# Altium PCB New_LXe_twr.PcbDoc (part 5 of 5)
Units mm, origin at the board's own origin, x right, y up, seen from the top; angles counter-clockwise.
Board outline 130 x 150 mm, 6 copper layers (Top Layer, Internal Plane 1, MidLayer1, MidLayer2, Internal Plane 2, Bottom Layer); 673 components, 504 nets, 5569 pads, 803 vias.
Unrouted connection lines stored in the file: 633.
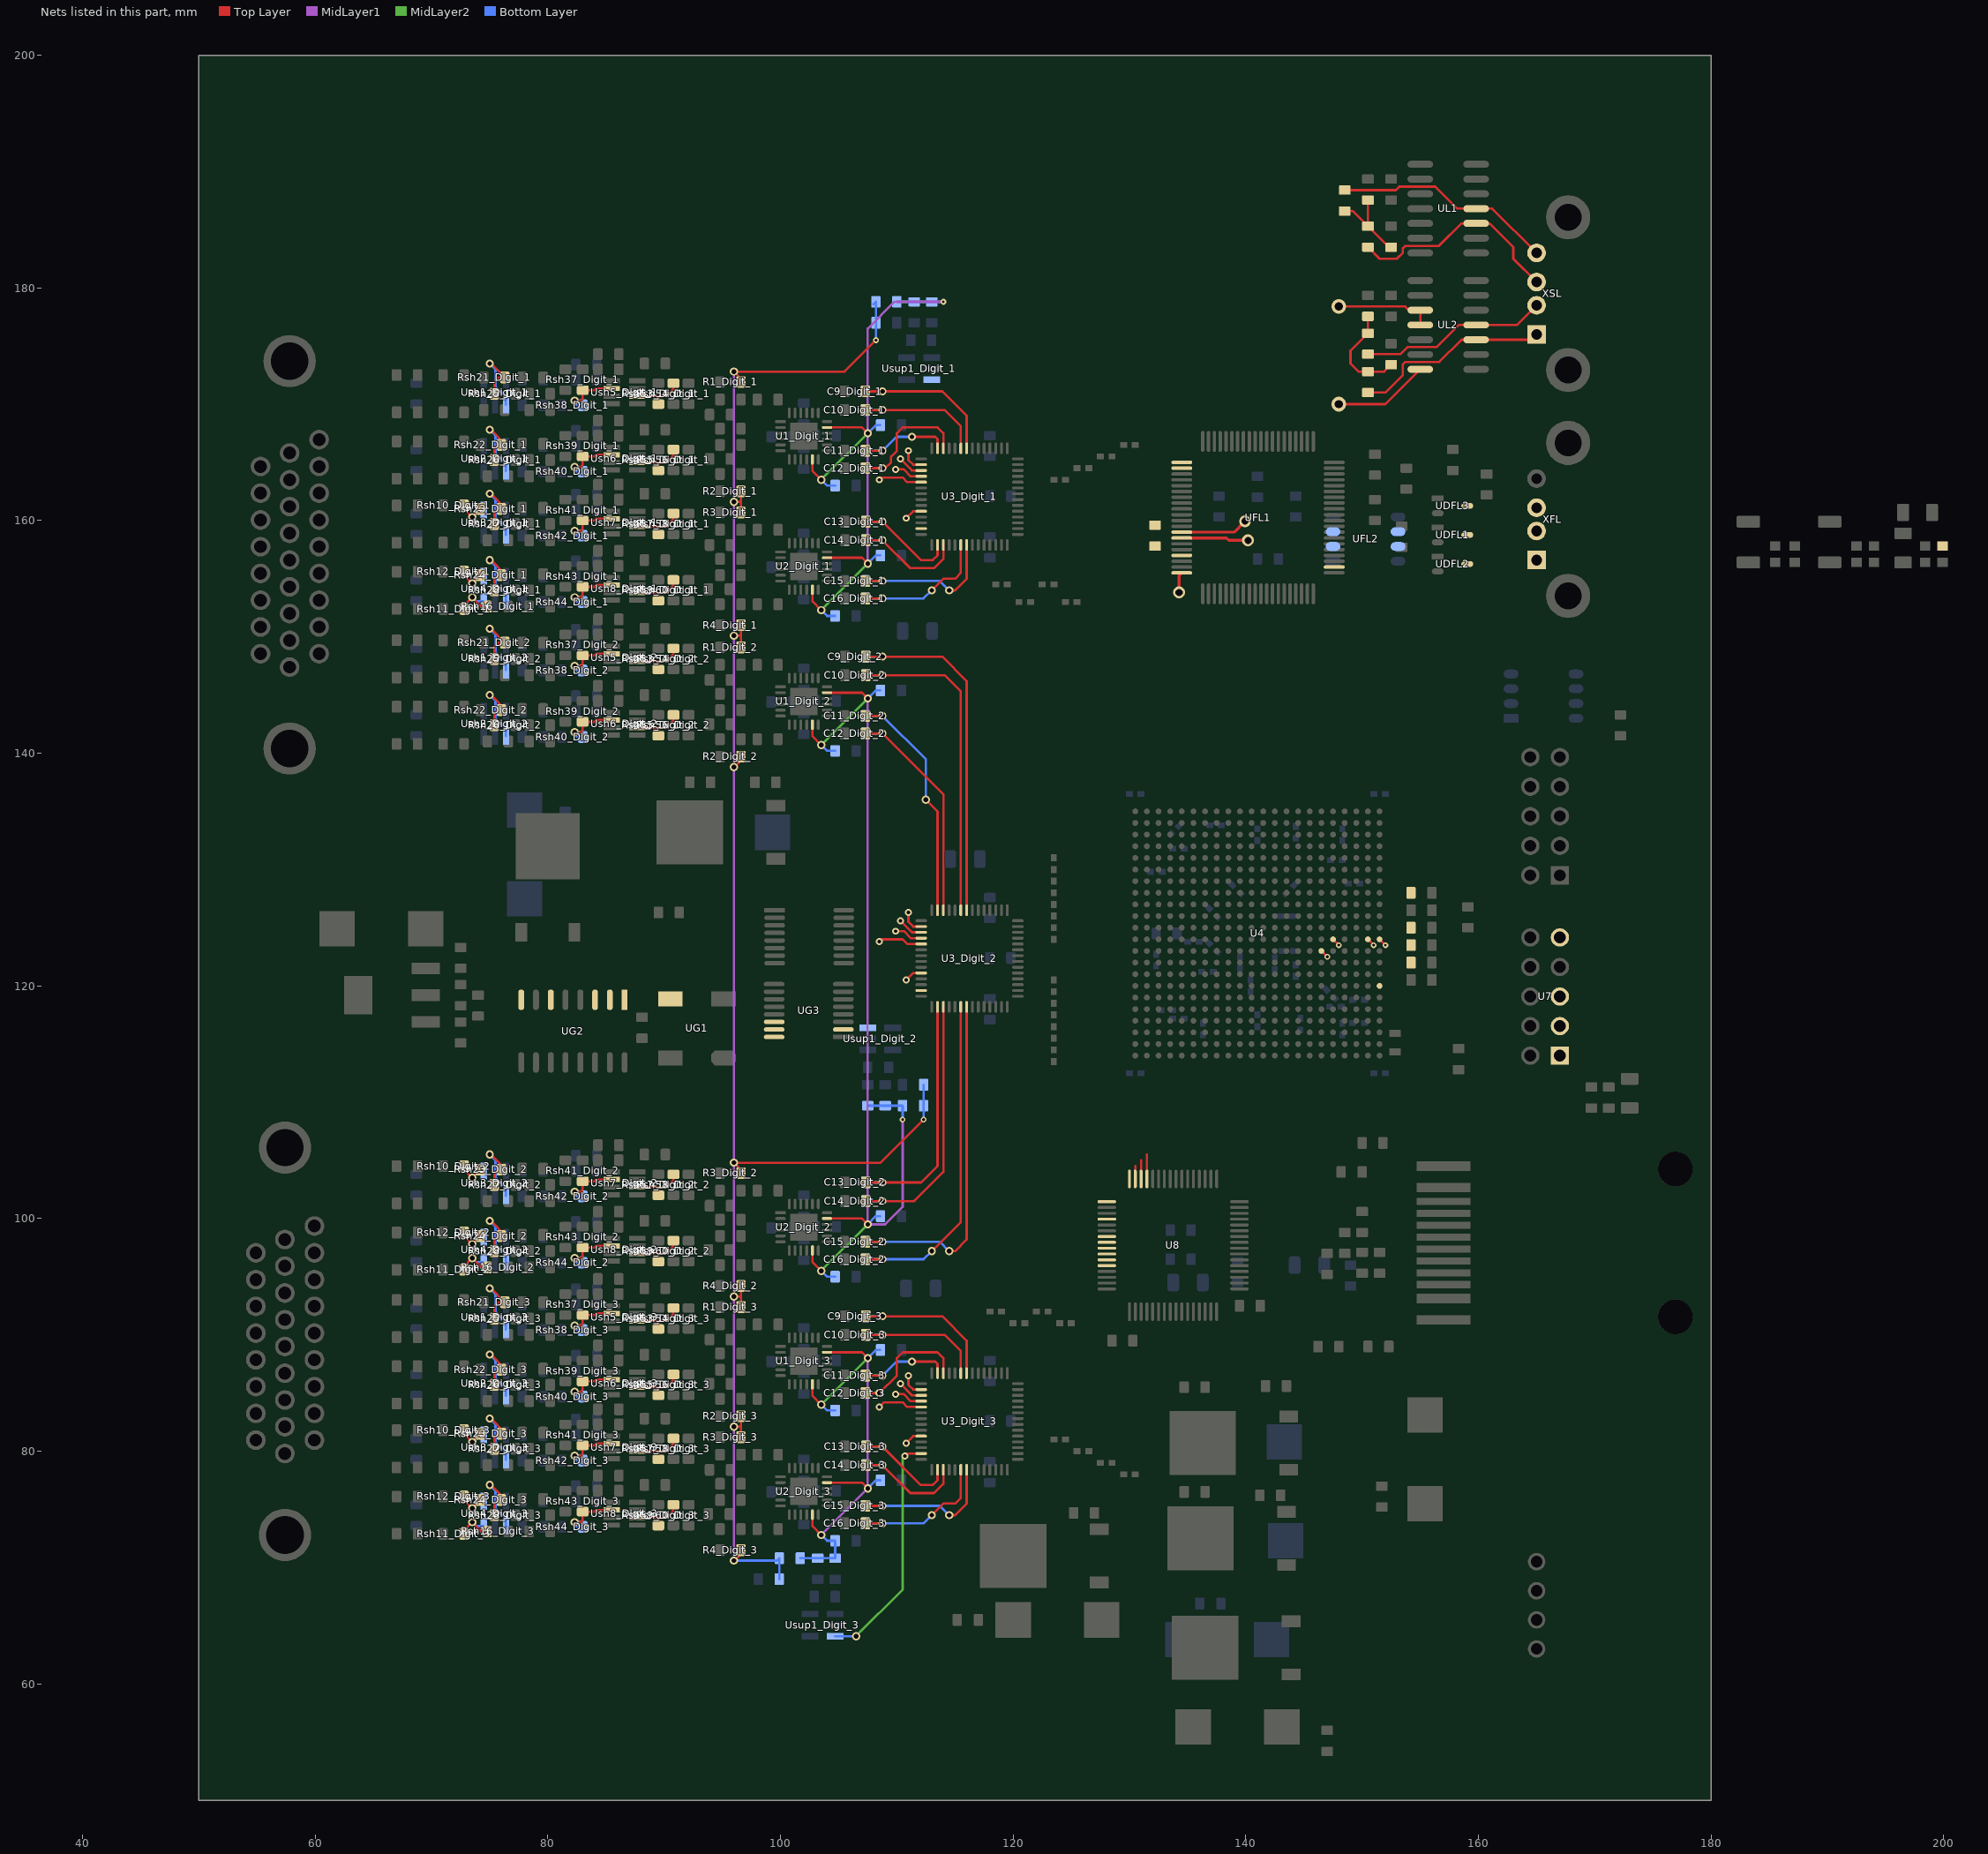
[diagram p9: the nets of this part, all layers, seen from the top]

## Via types
v1: diameter 0.5, hole 0.25, Top Layer to Bottom Layer, tented top, 430 vias
v2: diameter 0.7, hole 0.4, Top Layer to Bottom Layer, 251 vias
v3: diameter 1, hole 0.5, Top Layer to Bottom Layer, 48 vias
v4: diameter 0.6, hole 0.3, Top Layer to Bottom Layer, 31 vias
v5: diameter 1.2, hole 0.7, Top Layer to Bottom Layer, 12 vias
v6: diameter 1.016, hole 0.61, Top Layer to Bottom Layer, 9 vias
v7: diameter 1.27, hole 0.711, Top Layer to Bottom Layer, 9 vias
v8: diameter 5, hole 3, Top Layer to Bottom Layer, 6 vias
v9: diameter 0.8, hole 0.4, Top Layer to Bottom Layer, 4 vias
v10: diameter 0.6, hole 0.3, Top Layer to Bottom Layer, tented top, 2 vias
v11: diameter 1.2, hole 0.8, Top Layer to Bottom Layer, 1 vias

## Nets (pads, with @x,y where several pads share a name; then routed paths per layer and width w, separated by ;. In a path a pad name is that pad's centre, name@x,y a point inside that pad or via, vN(x,y) a via of type N, cw(c..) or ccw(c..) an arc to the next point about the centre after c; other vN are vias at no path point) (continued)
NetRsh10_Digit_1_2: Rsh10_Digit_1.2 Rsh23_Digit_1.1 Ush3_Digit_1.4 | length 3.5
  Top Layer w0.2: Rsh10_Digit_1.2@72.8,161.3 72.8,161 v2(73.5,160.3) Rsh23_Digit_1.1@74.2,161
  Bottom Layer w0.2: v2(73.5,160.3) 74.1,160.9 Ush3_Digit_1.4@74.5,160.9
NetRsh10_Digit_2_2: Rsh10_Digit_2.2 Rsh23_Digit_2.1 Ush3_Digit_2.4 | length 3.5
  Top Layer w0.2: Rsh10_Digit_2.2@72.8,104.5 72.8,104.2 v2(73.5,103.5) Rsh23_Digit_2.1@74.2,104.2
  Bottom Layer w0.2: v2(73.5,103.5) 74.1,104.1 Ush3_Digit_2.4@74.5,104.1
NetRsh10_Digit_3_2: Rsh10_Digit_3.2 Rsh23_Digit_3.1 Ush3_Digit_3.4 | length 3.2
  Top Layer w0.2: Rsh10_Digit_3.2@72.8,81.5 v2(73.5,80.8) Rsh23_Digit_3.1@74.2,81.5
  Bottom Layer w0.2: v2(73.5,80.8) 74.1,81.4 Ush3_Digit_3.4@74.5,81.4
NetRsh11_Digit_1_2: Rsh11_Digit_1.2 Rsh16_Digit_1.1 Ush4_Digit_1.3 | length 4.1
  Top Layer w0.2: Rsh11_Digit_1.2@72.8,152.4 72.8,152.7 v2(73.5,153.4) 74.3,152.6 Rsh16_Digit_1.1@74.8,152.6
  Bottom Layer w0.2: v2(73.5,153.4) 73.85,153.05 Ush4_Digit_1.3@74.5,153.05
NetRsh11_Digit_2_2: Rsh11_Digit_2.2 Rsh16_Digit_2.1 Ush4_Digit_2.3 | length 4.1
  Top Layer w0.2: Rsh11_Digit_2.2@72.8,95.6 72.8,95.9 v2(73.5,96.6) 74.3,95.8 Rsh16_Digit_2.1@74.8,95.8
  Bottom Layer w0.2: v2(73.5,96.6) 73.85,96.25 Ush4_Digit_2.3@74.5,96.25
NetRsh11_Digit_3_2: Rsh11_Digit_3.2 Rsh16_Digit_3.1 Ush4_Digit_3.3 | length 3.8
  Top Layer w0.2: Rsh11_Digit_3.2@72.8,73.2 v2(73.5,73.9) 74.3,73.1 Rsh16_Digit_3.1@74.8,73.1
  Bottom Layer w0.2: v2(73.5,73.9) 73.85,73.55 Ush4_Digit_3.3@74.5,73.55
NetRsh12_Digit_1_2: Rsh12_Digit_1.2 Rsh24_Digit_1.1 Ush4_Digit_1.4 | length 3.5
  Top Layer w0.2: Rsh12_Digit_1.2@72.8,155.6 72.8,155.3 v2(73.5,154.6) Rsh24_Digit_1.1@74.2,155.3
  Bottom Layer w0.2: v2(73.5,154.6) 74.1,155.2 Ush4_Digit_1.4@74.5,155.2
NetRsh12_Digit_2_2: Rsh12_Digit_2.2 Rsh24_Digit_2.1 Ush4_Digit_2.4 | length 3.5
  Top Layer w0.2: Rsh12_Digit_2.2@72.8,98.8 72.8,98.5 v2(73.5,97.8) Rsh24_Digit_2.1@74.2,98.5
  Bottom Layer w0.2: v2(73.5,97.8) 74.1,98.4 Ush4_Digit_2.4@74.5,98.4
NetRsh12_Digit_3_2: Rsh12_Digit_3.2 Rsh24_Digit_3.1 Ush4_Digit_3.4 | length 3.2
  Top Layer w0.2: Rsh12_Digit_3.2@72.8,75.8 v2(73.5,75.1) Rsh24_Digit_3.1@74.2,75.8
  Bottom Layer w0.2: v2(73.5,75.1) 74.1,75.7 Ush4_Digit_3.4@74.5,75.7
NetRsh21_Digit_1_2: Rsh21_Digit_1.2 Rsh25_Digit_1.2 Ush1_Digit_1.1 | length 8
  Top Layer w0.2: v2(75,173.5) 75.1,173.5 Rsh21_Digit_1.2@76.3,172.3 75.8,172.3 75.4,171.9 Rsh25_Digit_1.2@75.4,171.256 Rsh25_Digit_1.2@75.4,170.9
  Bottom Layer w0.2: v2(75,173.5) 75.5,173 75.5,171.5 76.4,170.6 Ush1_Digit_1.1@76.4,169.95
NetRsh21_Digit_2_2: Rsh21_Digit_2.2 Rsh25_Digit_2.2 Ush1_Digit_2.1 | length 8
  Top Layer w0.2: v2(75,150.7) 75.1,150.7 Rsh21_Digit_2.2@76.3,149.5 75.8,149.5 75.4,149.1 Rsh25_Digit_2.2@75.4,148.456 Rsh25_Digit_2.2@75.4,148.1
  Bottom Layer w0.2: v2(75,150.7) 75.5,150.2 75.5,148.7 76.4,147.8 Ush1_Digit_2.1@76.4,147.15
NetRsh21_Digit_3_2: Rsh21_Digit_3.2 Rsh25_Digit_3.2 Ush1_Digit_3.1 | length 8
  Top Layer w0.2: v2(75,94) 75.1,94 Rsh21_Digit_3.2@76.3,92.8 75.8,92.8 75.4,92.4 Rsh25_Digit_3.2@75.4,91.4
  Bottom Layer w0.2: v2(75,94) 75.5,93.5 75.5,92 76.4,91.1 Ush1_Digit_3.1@76.4,90.45
NetRsh22_Digit_1_2: Rsh22_Digit_1.2 Rsh26_Digit_1.2 Ush2_Digit_1.1 | length 8
  Top Layer w0.2: v2(75,167.8) 75.1,167.8 76.3,166.6 75.8,166.6 75.4,166.2 Rsh26_Digit_1.2@75.4,165.556 Rsh26_Digit_1.2@75.4,165.2
  Bottom Layer w0.2: v2(75,167.8) 75.5,167.3 75.5,165.8 76.4,164.9 Ush2_Digit_1.1@76.4,164.25
NetRsh22_Digit_2_2: Rsh22_Digit_2.2 Rsh26_Digit_2.2 Ush2_Digit_2.1 | length 8
  Top Layer w0.2: v2(75,145) 75.1,145 76.3,143.8 75.8,143.8 75.4,143.4 Rsh26_Digit_2.2@75.4,142.756 Rsh26_Digit_2.2@75.4,142.4
  Bottom Layer w0.2: v2(75,145) 75.5,144.5 75.5,143 76.4,142.1 Ush2_Digit_2.1@76.4,141.45
NetRsh22_Digit_3_2: Rsh22_Digit_3.2 Rsh26_Digit_3.2 Ush2_Digit_3.1 | length 8
  Top Layer w0.2: v2(75,88.3) 75.1,88.3 76.3,87.1 75.8,87.1 75.4,86.7 Rsh26_Digit_3.2@75.4,85.7
  Bottom Layer w0.2: v2(75,88.3) 75.5,87.8 75.5,86.3 76.4,85.4 Ush2_Digit_3.1@76.4,84.75
NetRsh23_Digit_1_2: Rsh23_Digit_1.2 Rsh27_Digit_1.2 Ush3_Digit_1.1 | length 8
  Top Layer w0.2: v2(75,162.3) 75.1,162.3 76.3,161.1 75.8,161.1 75.4,160.7 Rsh27_Digit_1.2@75.4,160.056 Rsh27_Digit_1.2@75.4,159.7
  Bottom Layer w0.2: v2(75,162.3) 75.5,161.8 75.5,160.3 76.4,159.4 Ush3_Digit_1.1@76.4,158.75
NetRsh23_Digit_2_2: Rsh23_Digit_2.2 Rsh27_Digit_2.2 Ush3_Digit_2.1 | length 8
  Top Layer w0.2: v2(75,105.5) 75.1,105.5 76.3,104.3 75.8,104.3 75.4,103.9 Rsh27_Digit_2.2@75.4,103.256 Rsh27_Digit_2.2@75.4,102.9
  Bottom Layer w0.2: v2(75,105.5) 75.5,105 75.5,103.5 76.4,102.6 Ush3_Digit_2.1@76.4,101.95
NetRsh23_Digit_3_2: Rsh23_Digit_3.2 Rsh27_Digit_3.2 Ush3_Digit_3.1 | length 8
  Top Layer w0.2: v2(75,82.8) 75.1,82.8 76.3,81.6 75.8,81.6 75.4,81.2 Rsh27_Digit_3.2@75.4,80.2
  Bottom Layer w0.2: v2(75,82.8) 75.5,82.3 75.5,80.8 76.4,79.9 Ush3_Digit_3.1@76.4,79.25
NetRsh24_Digit_1_2: Rsh24_Digit_1.2 Rsh28_Digit_1.2 Ush4_Digit_1.1 | length 8
  Top Layer w0.2: v2(75,156.6) 75.1,156.6 76.3,155.4 75.8,155.4 75.4,155 Rsh28_Digit_1.2@75.4,154.356 Rsh28_Digit_1.2@75.4,154
  Bottom Layer w0.2: v2(75,156.6) 75.5,156.1 75.5,154.6 76.4,153.7 Ush4_Digit_1.1@76.4,153.05
NetRsh24_Digit_2_2: Rsh24_Digit_2.2 Rsh28_Digit_2.2 Ush4_Digit_2.1 | length 8
  Top Layer w0.2: v2(75,99.8) 75.1,99.8 76.3,98.6 75.8,98.6 75.4,98.2 Rsh28_Digit_2.2@75.4,97.556 Rsh28_Digit_2.2@75.4,97.2
  Bottom Layer w0.2: v2(75,99.8) 75.5,99.3 75.5,97.8 76.4,96.9 Ush4_Digit_2.1@76.4,96.25
NetRsh24_Digit_3_2: Rsh24_Digit_3.2 Rsh28_Digit_3.2 Ush4_Digit_3.1 | length 8
  Top Layer w0.2: v2(75,77.1) 75.1,77.1 76.3,75.9 75.8,75.9 75.4,75.5 Rsh28_Digit_3.2@75.4,74.5
  Bottom Layer w0.2: v2(75,77.1) 75.5,76.6 75.5,75.1 76.4,74.2 Ush4_Digit_3.1@76.4,73.55
NetRsh37_Digit_1_1: Rsh37_Digit_1.1 Rsh38_Digit_1.2 Ush5_Digit_1.2 | length 5
  Top Layer w0.2: v2(82.3,170.3) 82.8,170.3 83,170.5 Rsh37_Digit_1.1@83,171.2 84,171.2 84.15,171.35 Ush5_Digit_1.2@85.5,171.35
  Bottom Layer w0.2: v2(82.3,170.3) 82.3,170.1 82.5,169.9 Rsh38_Digit_1.2@83,169.9
NetRsh37_Digit_2_1: Rsh37_Digit_2.1 Rsh38_Digit_2.2 Ush5_Digit_2.2 | length 5
  Top Layer w0.2: v2(82.3,147.5) 82.8,147.5 83,147.7 Rsh37_Digit_2.1@83,148.4 84,148.4 84.15,148.55 Ush5_Digit_2.2@85.5,148.55
  Bottom Layer w0.2: v2(82.3,147.5) 82.3,147.3 82.5,147.1 Rsh38_Digit_2.2@83,147.1
NetRsh37_Digit_3_1: Rsh37_Digit_3.1 Rsh38_Digit_3.2 Ush5_Digit_3.2 | length 5
  Top Layer w0.2: v2(82.3,90.8) 82.8,90.8 83,91 Rsh37_Digit_3.1@83,91.7 84,91.7 84.15,91.85 Ush5_Digit_3.2@85.5,91.85
  Bottom Layer w0.2: v2(82.3,90.8) 82.3,90.6 82.5,90.4 Rsh38_Digit_3.2@83,90.4
NetRsh39_Digit_1_1: Rsh39_Digit_1.1 Rsh40_Digit_1.2 Ush6_Digit_1.2 | length 5
  Top Layer w0.2: v2(82.3,164.6) 82.8,164.6 83,164.8 Rsh39_Digit_1.1@83,165.5 84,165.5 84.15,165.65 Ush6_Digit_1.2@85.5,165.65
  Bottom Layer w0.2: v2(82.3,164.6) 82.3,164.4 82.5,164.2 Rsh40_Digit_1.2@83,164.2
NetRsh39_Digit_2_1: Rsh39_Digit_2.1 Rsh40_Digit_2.2 Ush6_Digit_2.2 | length 5
  Top Layer w0.2: v2(82.3,141.8) 82.8,141.8 83,142 Rsh39_Digit_2.1@83,142.7 84,142.7 84.15,142.85 Ush6_Digit_2.2@85.5,142.85
  Bottom Layer w0.2: v2(82.3,141.8) 82.3,141.6 82.5,141.4 Rsh40_Digit_2.2@83,141.4
NetRsh39_Digit_3_1: Rsh39_Digit_3.1 Rsh40_Digit_3.2 Ush6_Digit_3.2 | length 5
  Top Layer w0.2: v2(82.3,85.1) 82.8,85.1 83,85.3 Rsh39_Digit_3.1@83,86 84,86 84.15,86.15 Ush6_Digit_3.2@85.5,86.15
  Bottom Layer w0.2: v2(82.3,85.1) 82.3,84.9 82.5,84.7 Rsh40_Digit_3.2@83,84.7
NetRsh41_Digit_1_1: Rsh41_Digit_1.1 Rsh42_Digit_1.2 Ush7_Digit_1.2 | length 5
  Top Layer w0.2: v2(82.3,159.1) 82.8,159.1 83,159.3 Rsh41_Digit_1.1@83,160 84,160 84.15,160.15 Ush7_Digit_1.2@85.5,160.15
  Bottom Layer w0.2: v2(82.3,159.1) 82.3,158.9 82.5,158.7 Rsh42_Digit_1.2@83,158.7
NetRsh41_Digit_2_1: Rsh41_Digit_2.1 Rsh42_Digit_2.2 Ush7_Digit_2.2 | length 5
  Top Layer w0.2: v2(82.3,102.3) 82.8,102.3 83,102.5 Rsh41_Digit_2.1@83,103.2 84,103.2 84.15,103.35 Ush7_Digit_2.2@85.5,103.35
  Bottom Layer w0.2: v2(82.3,102.3) 82.3,102.1 82.5,101.9 Rsh42_Digit_2.2@83,101.9
NetRsh41_Digit_3_1: Rsh41_Digit_3.1 Rsh42_Digit_3.2 Ush7_Digit_3.2 | length 5
  Top Layer w0.2: v2(82.3,79.6) 82.8,79.6 83,79.8 Rsh41_Digit_3.1@83,80.5 84,80.5 84.15,80.65 Ush7_Digit_3.2@85.5,80.65
  Bottom Layer w0.2: v2(82.3,79.6) 82.3,79.4 82.5,79.2 Rsh42_Digit_3.2@83,79.2
NetRsh43_Digit_1_1: Rsh43_Digit_1.1 Rsh44_Digit_1.2 Ush8_Digit_1.2 | length 5
  Top Layer w0.2: v2(82.3,153.4) 82.8,153.4 83,153.6 Rsh43_Digit_1.1@83,154.3 84,154.3 84.15,154.45 Ush8_Digit_1.2@85.5,154.45
  Bottom Layer w0.2: v2(82.3,153.4) 82.3,153.2 82.5,153 Rsh44_Digit_1.2@83,153
NetRsh43_Digit_2_1: Rsh43_Digit_2.1 Rsh44_Digit_2.2 Ush8_Digit_2.2 | length 5
  Top Layer w0.2: v2(82.3,96.6) 82.8,96.6 83,96.8 Rsh43_Digit_2.1@83,97.5 84,97.5 84.15,97.65 Ush8_Digit_2.2@85.5,97.65
  Bottom Layer w0.2: v2(82.3,96.6) 82.3,96.4 82.5,96.2 Rsh44_Digit_2.2@83,96.2
NetRsh43_Digit_3_1: Rsh43_Digit_3.1 Rsh44_Digit_3.2 Ush8_Digit_3.2 | length 5
  Top Layer w0.2: v2(82.3,73.9) 82.8,73.9 83,74.1 Rsh43_Digit_3.1@83,74.8 84,74.8 84.15,74.95 Ush8_Digit_3.2@85.5,74.95
  Bottom Layer w0.2: v2(82.3,73.9) 82.3,73.7 82.5,73.5 Rsh44_Digit_3.2@83,73.5
NetRsh53_Digit_1_1: Rsh53_Digit_1.1 Rsh54_Digit_1.2 Ush5_Digit_1.6 | length 4.5
  Top Layer w0.2: Ush5_Digit_1.6@87.7,170.7 90.2,170.7 90.8,171.3 Rsh54_Digit_1.2@90.8,171.8 ; Rsh53_Digit_1.1@89.5,170 89.5,170.7
NetRsh53_Digit_2_1: Rsh53_Digit_2.1 Rsh54_Digit_2.2 Ush5_Digit_2.6 | length 4.5
  Top Layer w0.2: Ush5_Digit_2.6@87.7,147.9 90.2,147.9 90.8,148.5 Rsh54_Digit_2.2@90.8,149 ; Rsh53_Digit_2.1@89.5,147.2 89.5,147.9
NetRsh53_Digit_3_1: Rsh53_Digit_3.1 Rsh54_Digit_3.2 Ush5_Digit_3.6 | length 4.5
  Top Layer w0.2: Ush5_Digit_3.6@87.7,91.2 90.2,91.2 90.8,91.8 Rsh54_Digit_3.2@90.8,92.3 ; Rsh53_Digit_3.1@89.5,90.5 89.5,91.2
NetRsh55_Digit_1_1: Rsh55_Digit_1.1 Rsh56_Digit_1.2 Ush6_Digit_1.6 | length 4.5
  Top Layer w0.2: Ush6_Digit_1.6@87.7,165 90.2,165 90.8,165.6 Rsh56_Digit_1.2@90.8,166.1 ; Rsh55_Digit_1.1@89.5,164.3 89.5,165
NetRsh55_Digit_2_1: Rsh55_Digit_2.1 Rsh56_Digit_2.2 Ush6_Digit_2.6 | length 4.5
  Top Layer w0.2: Ush6_Digit_2.6@87.7,142.2 90.2,142.2 90.8,142.8 Rsh56_Digit_2.2@90.8,143.3 ; Rsh55_Digit_2.1@89.5,141.5 89.5,142.2
NetRsh55_Digit_3_1: Rsh55_Digit_3.1 Rsh56_Digit_3.2 Ush6_Digit_3.6 | length 4.5
  Top Layer w0.2: Ush6_Digit_3.6@87.7,85.5 90.2,85.5 90.8,86.1 Rsh56_Digit_3.2@90.8,86.6 ; Rsh55_Digit_3.1@89.5,84.8 89.5,85.5
NetRsh57_Digit_1_1: Rsh57_Digit_1.1 Rsh58_Digit_1.2 Ush7_Digit_1.6 | length 4.5
  Top Layer w0.2: Ush7_Digit_1.6@87.7,159.5 90.2,159.5 90.8,160.1 Rsh58_Digit_1.2@90.8,160.6 ; Rsh57_Digit_1.1@89.5,158.8 89.5,159.5
NetRsh57_Digit_2_1: Rsh57_Digit_2.1 Rsh58_Digit_2.2 Ush7_Digit_2.6 | length 4.5
  Top Layer w0.2: Ush7_Digit_2.6@87.7,102.7 90.2,102.7 90.8,103.3 Rsh58_Digit_2.2@90.8,103.8 ; Rsh57_Digit_2.1@89.5,102 89.5,102.7
NetRsh57_Digit_3_1: Rsh57_Digit_3.1 Rsh58_Digit_3.2 Ush7_Digit_3.6 | length 4.5
  Top Layer w0.2: Ush7_Digit_3.6@87.7,80 90.2,80 90.8,80.6 Rsh58_Digit_3.2@90.8,81.1 ; Rsh57_Digit_3.1@89.5,79.3 89.5,80
NetRsh59_Digit_1_1: Rsh59_Digit_1.1 Rsh60_Digit_1.2 Ush8_Digit_1.6 | length 4.5
  Top Layer w0.2: Ush8_Digit_1.6@87.7,153.8 90.2,153.8 90.8,154.4 Rsh60_Digit_1.2@90.8,154.9 ; Rsh59_Digit_1.1@89.5,153.1 89.5,153.8
NetRsh59_Digit_2_1: Rsh59_Digit_2.1 Rsh60_Digit_2.2 Ush8_Digit_2.6 | length 4.5
  Top Layer w0.2: Ush8_Digit_2.6@87.7,97 90.2,97 90.8,97.6 Rsh60_Digit_2.2@90.8,98.1 ; Rsh59_Digit_2.1@89.5,96.3 89.5,97
NetRsh59_Digit_3_1: Rsh59_Digit_3.1 Rsh60_Digit_3.2 Ush8_Digit_3.6 | length 4.5
  Top Layer w0.2: Ush8_Digit_3.6@87.7,74.3 90.2,74.3 90.8,74.9 Rsh60_Digit_3.2@90.8,75.4 ; Rsh59_Digit_3.1@89.5,73.6 89.5,74.3
NetRSL1_1: RSL1.1 RSL2.1 RSL3.1 RSL4.1 | length 7.5
  Top Layer w0.2: RSL3.1@148.5,186.6 149.2,186.6 152.3,183.5 RSL4.1@152.5,183.5 ; RSL2.1@150.5,185.3 RSL1.1@150.5,187.55
NetRSL2_2: RSL2.2 UL1.10 XSL.3 | length 19.1
  Top Layer w0.2: RSL2.2@150.5,183.5 151.5,182.5 153,182.5 153.5,183 153.5,183.4 153.7,183.6 156.6,183.6 158.54,185.54 UL1.10@159.8,185.54 160.96,185.54 163,183.5 163,182.5 XSL.3@165,180.5
NetRSL3_2: RSL3.2 UL1.11 XSL.4 | length 19
  Top Layer w0.2: RSL3.2@148.5,188.4 152.9,188.4 153.2,188.7 156.3,188.7 158.19,186.81 UL1.11@159.8,186.81 161.19,186.81 XSL.4@165,183
NetRSL5_1: RSL5.1 RSL6.1 RSL7.1 RSL8.1 | length 8.7
  Top Layer w0.2: RSL5.1@150.5,177.55 RSL7.1@150.5,176.1 149,174.6 149,173.5 149.7,172.8 RSL6.1@150.5,172.8 151.9,172.8 RSL8.1@152.5,173.4
NetRSL6_2: RSL6.2 UL2.10 XSL.1 | length 17.1
  Top Layer w0.2: RSL6.2@150.5,171 152,171 153.5,172.5 153.5,173.431 153.699,173.63 156.63,173.63 158.54,175.54 UL2.10@159.8,175.54 164.54,175.54 XSL.1@165,176
NetRSL7_2: RSL7.2 UL2.11 XSL.2 | length 16.5
  Top Layer w0.2: RSL7.2@150.148,174.397 RSL7.2@150.345,174.2 ; RSL7.2@150.5,174.3 153.3,174.3 153.91,174.91 156.41,174.91 158.31,176.81 UL2.11@159.8,176.81 163.31,176.81 XSL.2@165,178.5
NetUL2_3: UL2.3 UL2.4 | length 8.4
  Top Layer w0.2: v7(148,178.4) 153.7,178.4 154.02,178.08 UL2.3@155,178.08 UL2.4@155,176.81
NetUL2_7: UL2.7 | length 8.2
  Top Layer w0.2: v7(148,170) 152,170 UL2.7@155,173
NetVD1_CATH: 
NSTATUS: R39.2 U4.K6 | length 0.7
  Top Layer w0.2: U4.K6@146.5,123 v1(147,122.5)
OK_LIGHT: RLED2.2
PLL_CLK: U4.G1 UG2.3 UG2.6 UG3.2
PLL_OE: UG3.14
PLL_S0: UG3.15
PLL_S1: UG3.16
QUARTZCLK: UG1.3 UG2.2
R_OUT+: UDFL1.3 UFL2.6 XFL.2
R_OUT-: UDFL2.3 UFL2.7 XFL.1
R_SYNC: UDFL3.3 UFL1.20 XFL.3 | length 1.7
  Top Layer w0.254: v6@134.265,153.9 134.265,155.265 UFL1.20@134.5,155.5
  other v6: 134.265,153.824
R_TD+: RFL4.2 UFL1.13 UFL2.3 | length 5.8
  Top Layer w0.254: UFL1.13@134.5,159 138.989,159 v6(139.933,159.944)
R_TD-: RFL4.1 UFL1.14 UFL2.2 | length 5.8
  Top Layer w0.254: UFL1.14@134.5,158.5 138.329,158.5 138.536,158.293 v6(140.187,158.293)
REN: UFL1.2
RESET_ADC: U3_Digit_1.24 U3_Digit_2.24 U3_Digit_3.24 | length 4.6
  Top Layer w0.2: v4(110.8,80.7) 111.4,81.3 U3_Digit_3.24@112.1,81.3 ; v4(110.8,120.5) 111.4,121.1 U3_Digit_2.24@112.1,121.1 ; v4(110.8,160.2) 111.4,160.8 U3_Digit_1.24@112.1,160.8
RPWDN: UFL1.1
RX_CLK: U8.52
RX_DV: U8.49
RXD0: U8.48
RXD1: U8.47 | length 1.1
  Top Layer w0.2: U8.47@130.5,103.4 130.5,104.5
RXD2: U8.46 | length 1.6
  Top Layer w0.2: U8.46@131,103.4 131,105
RXD3: U8.45 | length 2.1
  Top Layer w0.2: U8.45@131.5,103.4 131.5,105.5
SCLK: U3_Digit_1.16 U3_Digit_2.16 U3_Digit_3.16 | length 6.2
  Top Layer w0.2: v4(111,86.5) 111,85.7 111.4,85.3 U3_Digit_3.16@112.1,85.3 ; v4(111,126.3) 111,125.5 111.4,125.1 U3_Digit_2.16@112.1,125.1 ; v4(111,166) 111,165.2 111.4,164.8 U3_Digit_1.16@112.1,164.8
SDATA: U3_Digit_1.17 U3_Digit_2.17 U3_Digit_3.17 | length 6.6
  Top Layer w0.2: v4(110.3,85.8) 111.3,84.8 U3_Digit_3.17@112.1,84.8 ; v4(110.3,125.6) 111.3,124.6 U3_Digit_2.17@112.1,124.6 ; v4(110.3,165.3) 111.3,164.3 U3_Digit_1.17@112.1,164.3
SDOUT: U3_Digit_1.19 U3_Digit_2.19 U3_Digit_3.19 | length 11.6
  Top Layer w0.2: v4(108.5,83.8) 108.9,84.2 110.5,84.2 110.9,83.8 U3_Digit_3.19@112.1,83.8 ; v4(108.5,123.8) 108.7,124 110.5,124 110.9,123.6 U3_Digit_2.19@112.1,123.6 ; v4(108.5,163.5) 108.7,163.7 110.5,163.7 110.9,163.3 U3_Digit_1.19@112.1,163.3
SEN: U3_Digit_1.18 U3_Digit_2.18 U3_Digit_3.18 | length 7.3
  Top Layer w0.2: v4(109.9,84.9) 110.6,84.9 111.2,84.3 U3_Digit_3.18@112.1,84.3 ; v4(109.9,124.7) 110.6,124.7 111.2,124.1 U3_Digit_2.18@112.1,124.1 ; v4(109.9,164.4) 110.6,164.4 111.2,163.8 U3_Digit_1.18@112.1,163.8
SERCLK: UFL1.17
SW_LINKCLK: UG2.8
SW_QUARTZ: UG2.1
TCK: R42.2 U4.L2 U7.1 | length 0.7
  Top Layer w0.2: U4.L2@150.5,124 v1(151,123.5)
TDI: R40.2 U4.L5 U7.9 | length 0.7
  Top Layer w0.2: U4.L5@147.5,124 v1(148,123.5)
TDO: U7.3
TMS: R41.2 U4.L1 U7.5 | length 0.7
  Top Layer w0.2: U4.L1@151.5,124 v1(152,123.5)
TPWDN: UFL1.42
TX_CLK: U8.55
TX_EN: U8.56
TXD0: U8.57
TXD1: U8.58
TXD2: U8.59
TXD3: U8.60
UDIFF_CH1+_Digit_1: C10_Digit_1.2 R22_Digit_1.2 U3_Digit_1.9 | length 12.1
  Top Layer w0.2: R22_Digit_1.2@107.3,169.5 v2(108.768,169.5) 114.1,169.5 115.5,168.1 U3_Digit_1.9@115.5,166.2
  Bottom Layer w0.2: C10_Digit_1.2@107.3,169.5 v2(108.768,169.5)
UDIFF_CH1+_Digit_2: C10_Digit_2.2 R22_Digit_2.2 U3_Digit_2.9 | length 29
  Top Layer w0.2: R22_Digit_2.2@107.3,146.7 v2(108.768,146.7) 114.1,146.7 115.5,145.3 U3_Digit_2.9@115.5,126.5
  Bottom Layer w0.2: C10_Digit_2.2@107.3,146.7 v2(108.768,146.7)
UDIFF_CH1+_Digit_3: C10_Digit_3.2 R22_Digit_3.2 U3_Digit_3.9 | length 12.1
  Top Layer w0.2: R22_Digit_3.2@107.3,90 v2(108.768,90) 114.1,90 115.5,88.6 U3_Digit_3.9@115.5,86.7
  Bottom Layer w0.2: C10_Digit_3.2@107.3,90 v2(108.768,90)
UDIFF_CH1-_Digit_1: C9_Digit_1.1 R21_Digit_1.2 U3_Digit_1.8 | length 13.8
  Top Layer w0.2: R21_Digit_1.2@107.3,171.1 v2(108.768,171.1) 113.9,171.1 116,169 U3_Digit_1.8@116,166.2
  Bottom Layer w0.2: C9_Digit_1.1@107.3,171.1 v2(108.768,171.1)
UDIFF_CH1-_Digit_2: C9_Digit_2.1 R21_Digit_2.2 U3_Digit_2.8 | length 30.7
  Top Layer w0.2: R21_Digit_2.2@107.3,148.3 v2(108.768,148.3) 113.9,148.3 116,146.2 U3_Digit_2.8@116,126.5
  Bottom Layer w0.2: C9_Digit_2.1@107.3,148.3 v2(108.768,148.3)
UDIFF_CH1-_Digit_3: C9_Digit_3.1 R21_Digit_3.2 U3_Digit_3.8 | length 13.8
  Top Layer w0.2: R21_Digit_3.2@107.3,91.6 v2(108.768,91.6) 113.9,91.6 116,89.5 U3_Digit_3.8@116,86.7
  Bottom Layer w0.2: C9_Digit_3.1@107.3,91.6 v2(108.768,91.6)
UDIFF_CH2+_Digit_1: C12_Digit_1.2 R24_Digit_1.2 U3_Digit_1.12 | length 12.3
  Top Layer w0.2: R24_Digit_1.2@107.3,164.5 107.554,164.5 v2(108.768,164.5) 109,164.5 109.5,165 109.5,165.5 110,166 110,167.5 110.5,168 113.5,168 114,167.5 U3_Digit_1.12@114,166.2
  Bottom Layer w0.2: C12_Digit_1.2@107.3,164.5 C12_Digit_1.2@107.554,164.5 v2(108.768,164.5)
UDIFF_CH2+_Digit_2: C12_Digit_2.2 R24_Digit_2.2 U3_Digit_2.12 | length 20.3
  Top Layer w0.2: R24_Digit_2.2@107.3,141.7 107.554,141.7 v2(108.768,141.7) 114,136.468 U3_Digit_2.12@114,126.5
  Bottom Layer w0.2: C12_Digit_2.2@107.3,141.7 C12_Digit_2.2@107.554,141.7 v2(108.768,141.7)
UDIFF_CH2+_Digit_3: C12_Digit_3.2 R24_Digit_3.2 U3_Digit_3.12 | length 11.7
  Top Layer w0.2: R24_Digit_3.2@107.3,85 v2(108.5,85) 110,86.5 110,88 110.5,88.5 113.5,88.5 114,88 U3_Digit_3.12@114,86.7
  Bottom Layer w0.2: C12_Digit_3.2@107.3,85 v2(108.5,85)
UDIFF_CH2-_Digit_1: C11_Digit_1.1 R23_Digit_1.2 U3_Digit_1.13 | length 9
  Top Layer w0.2: R23_Digit_1.2@107.3,166 107.554,166 v2(108.768,166) ; v2(111.3,167.2) 113.3,167.2 113.5,167 U3_Digit_1.13@113.5,166.2
  Bottom Layer w0.2: C11_Digit_1.1@107.3,166 C11_Digit_1.1@107.554,166 v2(108.768,166) 109.968,167.2 v2(111.3,167.2)
UDIFF_CH2-_Digit_2: C11_Digit_2.1 R23_Digit_2.2 U3_Digit_2.13 | length 21.6
  Top Layer w0.2: R23_Digit_2.2@107.3,143.2 107.554,143.2 v2(108.768,143.2) ; v2(112.5,136) 113.5,135 U3_Digit_2.13@113.5,126.5
  Bottom Layer w0.2: C11_Digit_2.1@107.3,143.2 C11_Digit_2.1@107.554,143.2 v2(108.768,143.2) 112.5,139.468 v2(112.5,136)
UDIFF_CH2-_Digit_3: C11_Digit_3.1 R23_Digit_3.2 U3_Digit_3.13 | length 9
  Top Layer w0.2: R23_Digit_3.2@107.3,86.5 v2(108.768,86.5) ; v2(111.3,87.7) 113.3,87.7 113.5,87.5 U3_Digit_3.13@113.5,86.7
  Bottom Layer w0.2: C11_Digit_3.1@107.3,86.5 v2(108.768,86.5) 109.968,87.7 v2(111.3,87.7)
UDIFF_CH3+_Digit_1: C14_Digit_1.2 R26_Digit_1.2 U3_Digit_1.31 | length 10.7
  Top Layer w0.2: R26_Digit_1.2@107.3,158.3 v2(108.768,158.3) 111.168,155.9 113.2,155.9 114,156.7 U3_Digit_1.31@114,157.9
  Bottom Layer w0.2: C14_Digit_1.2@107.3,158.3 v2(108.768,158.3)
UDIFF_CH3+_Digit_2: C14_Digit_2.2 R26_Digit_2.2 U3_Digit_2.31 | length 23.4
  Top Layer w0.2: R26_Digit_2.2@107.3,101.5 v2(108.768,101.5) 111.5,101.5 114,104 U3_Digit_2.31@114,118.2
  Bottom Layer w0.2: C14_Digit_2.2@107.3,101.5 v2(108.768,101.5)
UDIFF_CH3+_Digit_3: C14_Digit_3.2 R26_Digit_3.2 U3_Digit_3.31 | length 10.7
  Top Layer w0.2: R26_Digit_3.2@107.3,78.8 v2(108.768,78.8) 111.168,76.4 113.2,76.4 114,77.2 U3_Digit_3.31@114,78.4
  Bottom Layer w0.2: C14_Digit_3.2@107.3,78.8 v2(108.768,78.8)
UDIFF_CH3-_Digit_1: C13_Digit_1.1 R25_Digit_1.2 U3_Digit_1.30 | length 10.1
  Top Layer w0.2: R25_Digit_1.2@107.3,159.9 v2(108.768,159.9) 112.068,156.6 113.1,156.6 113.5,157 U3_Digit_1.30@113.5,157.9
  Bottom Layer w0.2: C13_Digit_1.1@107.3,159.9 v2(108.768,159.9)
UDIFF_CH3-_Digit_2: C13_Digit_2.1 R25_Digit_2.2 U3_Digit_2.30 | length 21.9
  Top Layer w0.2: R25_Digit_2.2@107.3,103.1 v2(108.768,103.1) 112.1,103.1 113.5,104.5 U3_Digit_2.30@113.5,118.2
  Bottom Layer w0.2: C13_Digit_2.1@107.3,103.1 v2(108.768,103.1)
UDIFF_CH3-_Digit_3: C13_Digit_3.1 R25_Digit_3.2 U3_Digit_3.30 | length 10.1
  Top Layer w0.2: R25_Digit_3.2@107.3,80.4 v2(108.768,80.4) 112.068,77.1 113.1,77.1 113.5,77.5 U3_Digit_3.30@113.5,78.4
  Bottom Layer w0.2: C13_Digit_3.1@107.3,80.4 v2(108.768,80.4)
UDIFF_CH4+_Digit_1: C16_Digit_1.2 R28_Digit_1.2 U3_Digit_1.34 | length 13.2
  Top Layer w0.2: R28_Digit_1.2@107.3,153.3 107.554,153.3 v2(108.768,153.3) ; v2(113,154) 114,155 115,155 115.5,155.5 U3_Digit_1.34@115.5,158.1
  Bottom Layer w0.2: C16_Digit_1.2@107.3,153.3 C16_Digit_1.2@107.554,153.3 v2(108.768,153.3) 112.3,153.3 v2(113,154)
UDIFF_CH4+_Digit_2: C16_Digit_2.2 R28_Digit_2.2 U3_Digit_2.34 | length 29.5
  Top Layer w0.2: R28_Digit_2.2@107.3,96.5 v2(108.768,96.5) ; v2(113,97.2) 115.5,99.7 U3_Digit_2.34@115.5,118.2
  Bottom Layer w0.2: C16_Digit_2.2@107.3,96.5 v2(108.768,96.5) 112.3,96.5 v2(113,97.2)
UDIFF_CH4+_Digit_3: C16_Digit_3.2 R28_Digit_3.2 U3_Digit_3.34 | length 13
  Top Layer w0.2: R28_Digit_3.2@107.3,73.8 v2(108.768,73.8) ; v2(113,74.5) 114,75.5 115,75.5 115.5,76 U3_Digit_3.34@115.5,78.4
  Bottom Layer w0.2: C16_Digit_3.2@107.3,73.8 v2(108.768,73.8) 112.3,73.8 v2(113,74.5)
UDIFF_CH4-_Digit_1: C15_Digit_1.1 R27_Digit_1.2 U3_Digit_1.35 | length 13.8
  Top Layer w0.2: R27_Digit_1.2@107.3,154.8 107.554,154.8 v2(108.768,154.8) ; v2(114.5,154) 115,154 116,155 U3_Digit_1.35@116,157.9
  Bottom Layer w0.2: C15_Digit_1.1@107.3,154.8 C15_Digit_1.1@107.554,154.8 v2(108.768,154.8) 113.7,154.8 v2(114.5,154)
UDIFF_CH4-_Digit_2: C15_Digit_2.1 R27_Digit_2.2 U3_Digit_2.35 | length 30.9
  Top Layer w0.2: R27_Digit_2.2@107.3,98 v2(108.768,98) ; v2(114.5,97.2) 115,97.2 116,98.2 U3_Digit_2.35@116,118.2
  Bottom Layer w0.2: C15_Digit_2.1@107.3,98 v2(108.768,98) 113.7,98 v2(114.5,97.2)
UDIFF_CH4-_Digit_3: C15_Digit_3.1 R27_Digit_3.2 U3_Digit_3.35 | length 13.8
  Top Layer w0.2: R27_Digit_3.2@107.3,75.3 v2(108.768,75.3) ; v2(114.5,74.5) 115,74.5 116,75.5 U3_Digit_3.35@116,78.4
  Bottom Layer w0.2: C15_Digit_3.1@107.3,75.3 v2(108.768,75.3) 113.7,75.3 v2(114.5,74.5)
VCM: C1_Digit_1.2 C1_Digit_2.2 C1_Digit_3.2 C2_Digit_1.2 C2_Digit_2.2 C2_Digit_3.2 C3_Digit_1.2 C3_Digit_2.2 C3_Digit_3.2 C4_Digit_1.2 C4_Digit_2.2 C4_Digit_3.2 R37_Digit_1.2 R37_Digit_2.2 R37_Digit_3.2 R38_Digit_1.2 R38_Digit_2.2 R38_Digit_3.2 R40_Digit_1.1 R40_Digit_2.1 R40_Digit_3.1 U1_Digit_1.11 U1_Digit_1.17 U1_Digit_2.11 U1_Digit_2.17 U1_Digit_3.11 U1_Digit_3.17 U2_Digit_1.11 U2_Digit_1.17 U2_Digit_2.11 U2_Digit_2.17 U2_Digit_3.11 U2_Digit_3.17 | length 193.2
  Top Layer w0.2: U2_Digit_3.11@102.75,74.55 102.75,73.55 v2(103.5,72.8) ; U1_Digit_3.11@102.75,85.75 102.75,84.75 v2(103.5,84) ; U2_Digit_2.11@102.75,97.25 102.75,96.25 v2(103.5,95.5) ; U1_Digit_2.11@102.75,142.45 102.75,141.45 v2(103.5,140.7) ; U2_Digit_1.11@102.75,154.05 102.75,153.05 v2(103.5,152.3) ; U1_Digit_1.11@102.75,165.25 102.75,164.25 v2(103.5,163.5) ; U2_Digit_3.17@104,77.3 107,77.3 v2(107.5,76.8) ; U1_Digit_3.17@104,88.5 107,88.5 v2(107.5,88) ; U2_Digit_2.17@104,100 107,100 v2(107.5,99.5) ; U1_Digit_2.17@104,145.2 107,145.2 v2(107.5,144.7) ; U2_Digit_1.17@104,156.8 107,156.8 v2(107.5,156.3) ; U1_Digit_1.17@104,168 107,168 v2(107.5,167.5)
  MidLayer1 w0.2: v2(103.5,72.8) v2(107.5,76.8) v2(107.5,88) ; v2(107.5,144.7) v2(107.5,99.5) 109,99.5 110.5,101 v1(110.5,108.5) ; v2(107.5,156.3) v2(107.5,167.5) 107.5,176.5 109.8,178.8 v1(114,178.8)
  MidLayer2 w0.2: v2(103.5,84) v2(107.5,88) ; v2(103.5,95.5) v2(107.5,99.5) ; v2(103.5,140.7) v2(107.5,144.7) ; v2(103.5,152.3) v2(107.5,156.3) ; v2(103.5,163.5) v2(107.5,167.5)
  Bottom Layer w0.2: R40_Digit_3.1@101.7,70.8 R37_Digit_3.2@104.7,70.8 C4_Digit_3.2@104.7,72.3 104,72.3 v2(103.5,72.8) ; v2(103.5,84) 104,83.5 C2_Digit_3.2@104.7,83.5 ; v2(103.5,95.5) 104,95 C4_Digit_2.2@104.7,95 ; v2(103.5,140.7) 104,140.2 C2_Digit_2.2@104.7,140.2 ; v2(103.5,152.3) 104,151.8 C4_Digit_1.2@104.7,151.8 ; v2(103.5,163.5) 104,163 C2_Digit_1.2@104.7,163 ; v2(107.5,76.8) 108.2,77.5 C3_Digit_3.2@108.6,77.5 ; v2(107.5,88) 108.2,88.7 C1_Digit_3.2@108.6,88.7 ; v2(107.5,99.5) 108.2,100.2 C3_Digit_2.2@108.6,100.2 ; R37_Digit_2.2@107.5,109.7 R40_Digit_2.1@110.5,109.7 v1(110.5,108.5) ; v2(107.5,144.7) 108.2,145.4 C1_Digit_2.2@108.6,145.4 ; v2(107.5,156.3) 108.2,157 C3_Digit_1.2@108.6,157 ; v2(107.5,167.5) 108.2,168.2 C1_Digit_1.2@108.6,168.2 ; R40_Digit_1.1@110,178.8 v1(114,178.8)
VOFFSET+: R1_Digit_1.2 R1_Digit_2.2 R1_Digit_3.2 R2_Digit_1.2 R2_Digit_2.2 R2_Digit_3.2 R3_Digit_1.2 R3_Digit_2.2 R3_Digit_3.2 R4_Digit_1.2 R4_Digit_2.2 R4_Digit_3.2 R40_Digit_1.2 R40_Digit_2.2 R40_Digit_3.2 R41_Digit_1.1 R41_Digit_2.1 R41_Digit_3.1 | length 160.4
  Top Layer w0.2: v2(96,70.6) 96,70.544 R4_Digit_3.2@96.6,71.144 R4_Digit_3.2@96.6,71.5 ; v2(96,82.1) 96.6,82.1 ; v2(96,93.3) 96.6,93.3 ; v2(96,138.8) 96,138.744 R2_Digit_2.2@96.6,139.344 R2_Digit_2.2@96.6,139.7 ; v2(96,150.1) 96.6,150.1 ; v2(96,161.6) 96.6,161.6 ; R3_Digit_3.2@96.6,81.1 R3_Digit_3.2@96.6,81.2 R3_Digit_3.2@96.6,81.556 R2_Digit_3.2@96.6,82.644 R2_Digit_3.2@96.6,83 ; R1_Digit_3.2@96.6,92.3 R1_Digit_3.2@96.6,92.4 R1_Digit_3.2@96.6,92.756 R4_Digit_2.2@96.6,93.844 R4_Digit_2.2@96.6,94.2 ; R3_Digit_2.2@96.6,103.9 96.6,104.2 v2(96,104.8) 108.6,104.8 v1(112.3,108.5) ; R1_Digit_2.2@96.6,149.1 R1_Digit_2.2@96.6,149.456 R4_Digit_1.2@96.6,150.644 R4_Digit_1.2@96.6,151 ; R3_Digit_1.2@96.6,160.7 R3_Digit_1.2@96.6,161.056 R2_Digit_1.2@96.6,162.144 R2_Digit_1.2@96.6,162.5 ; R1_Digit_1.2@96.6,171.9 96.6,172.2 v2(96,172.8) 105.5,172.8 v1(108.2,175.5)
  MidLayer1 w0.2: v2(96,70.6) v2(96,82.1) v2(96,93.3) v2(96,104.8) v2(96,138.8) v2(96,150.1) v2(96,161.6) v2(96,172.8)
  Bottom Layer w0.2: v2(96,70.6) 99.7,70.6 R40_Digit_3.2@99.9,70.8 R41_Digit_3.1@99.9,69 ; R40_Digit_1.2@108,178.6 R40_Digit_1.2@108.2,178.8 R41_Digit_1.1@108.2,177 v1(108.2,175.5) ; v1(112.3,108.5) R40_Digit_2.2@112.3,109.7 R41_Digit_2.1@112.3,111.5
VREF_Digit_1: U3_Digit_1.27 Usup1_Digit_1.3
VREF_Digit_2: U3_Digit_2.27 Usup1_Digit_2.3
VREF_Digit_3: U3_Digit_3.27 Usup1_Digit_3.3 | length 20.6
  Top Layer w0.2: v10(110.7,79.6) 110.9,79.8 U3_Digit_3.27@112.1,79.8
  MidLayer2 w0.2: v2(106.5,64.1) 110.5,68.1 110.5,79.4 v10(110.7,79.6) v10@110.7,79.5
  Bottom Layer w0.2: Usup1_Digit_3.3@104.7,64.1 v2(106.5,64.1)
pads on no net: Csup1.1 Csup_1.+ JEth1.6 JEth1.9 JEth1.13 JEth1.14 LX1.1 LX1.4 U1_Digit_1.14 U1_Digit_1.20 U1_Digit_2.14 U1_Digit_2.20 U1_Digit_3.14 U1_Digit_3.20 U2_Digit_1.14 U2_Digit_1.20 U2_Digit_2.14 U2_Digit_2.20 U2_Digit_3.14 U2_Digit_3.20 U3_Digit_1.0 U3_Digit_1.25 U3_Digit_1.26 U3_Digit_1.37 U3_Digit_1.50 U3_Digit_1.51 U3_Digit_2.0 U3_Digit_2.25 U3_Digit_2.26 U3_Digit_2.37 U3_Digit_2.50 U3_Digit_2.51 U3_Digit_3.0 U3_Digit_3.25 U3_Digit_3.26 U3_Digit_3.37 U3_Digit_3.50 U3_Digit_3.51 U4.A3 U4.A4 U4.A5 U4.A6 U4.A7 U4.A8 U4.A9 U4.A10 U4.A13 U4.A14 U4.A15 U4.A16 U4.A17 U4.A18 U4.A19 U4.A20 U4.AA1 U4.AA3 U4.AA4 U4.AA5 U4.AA7 U4.AA8 U4.AA9 U4.AA10 U4.AA13 U4.AA14 U4.AA15 U4.AA16 U4.AA17 U4.AA18 U4.AA19 U4.AA20 U4.AA21 U4.AB3 U4.AB4 U4.AB5 U4.AB7 U4.AB8 U4.AB9 U4.AB10 U4.AB13 U4.AB14 U4.AB15 U4.AB16 U4.AB17 U4.AB18 U4.AB19 U4.AB20 U4.B1 U4.B2 U4.B3 U4.B4 U4.B5 U4.B6 U4.B7 U4.B8 U4.B9 U4.B10 U4.B13 U4.B14 U4.B15 U4.B16 U4.B17 U4.B18 U4.B19 U4.B20 U4.B21 U4.B22 U4.C1 U4.C2 U4.C3 U4.C4 U4.C6 U4.C7 U4.C8 U4.C10 U4.C13 U4.C15 U4.C17 U4.C19 U4.C20 U4.C21 U4.C22 U4.D2 U4.D6 U4.D7 U4.D10 U4.D13 U4.D15 U4.D17 U4.D19 U4.D20 U4.D21 U4.D22 U4.E1 U4.E3 U4.E4 U4.E5 U4.E6 U4.E7 U4.E9 U4.E10 U4.E11 U4.E12 U4.E13 U4.E14 U4.E15 U4.E16 U4.E21 U4.E22 U4.F1 U4.F2 U4.F7 U4.F8 U4.F9 U4.F10 U4.F11 U4.F13 U4.F14 U4.F15 U4.F16 U4.F17 U4.F19 U4.F20 U4.F21 U4.F22 U4.G3 U4.G4 U4.G5 U4.G7 U4.G8 U4.G9 U4.G10 U4.G11 U4.G13 U4.G14 U4.G15 U4.G16 U4.G17 U4.G18 U4.H1 U4.H2 U4.H5 U4.H6 U4.H7 U4.H8 U4.H10 U4.H11 U4.H14 U4.H15 U4.H16 U4.H17 U4.H18 U4.H19 U4.H20 U4.H21 U4.H22 U4.J1 U4.J2 U4.J3 U4.J4 U4.J5 U4.J6 U4.J7 U4.J8 U4.J17 U4.J18 U4.J21 U4.J22 U4.K7 U4.K8 U4.K17 U4.K18 U4.K19 U4.K21 U4.K22 U4.L4 U4.L6 U4.L7 U4.L8 U4.L21 U4.L22 U4.M1 U4.M2 U4.M3 U4.M4 U4.M5 U4.M6 U4.M7 U4.M8 U4.M16 U4.M19 U4.M20 U4.M21 U4.M22 U4.N1 U4.N2 U4.N5 U4.N6 U4.N7 U4.N8 U4.N16 U4.N17 U4.N18 U4.N19 U4.N20 U4.N21 U4.N22 U4.P1 U4.P2 U4.P3 U4.P4 U4.P5 U4.P6 U4.P7 U4.P15 U4.P16 U4.P17 U4.P20 U4.P21 U4.P22 U4.R1 U4.R2 U4.R5 U4.R6 U4.R7 U4.R14 U4.R15 U4.R16 U4.R17 U4.R18 U4.R19 U4.R20 U4.R21 U4.R22 U4.T3 U4.T4 U4.T5 U4.T7 U4.T8 U4.T9 U4.T10 U4.T11 U4.T12 U4.T13 U4.T14 U4.T15 U4.T16 U4.T17 U4.T18 U4.U1 U4.U2 U4.U7 U4.U8 U4.U9 U4.U10 U4.U11 U4.U12 U4.U13 U4.U14 U4.U15 U4.U16 U4.U17 U4.U19 U4.U20 U4.U21 U4.U22 U4.V1 U4.V2 U4.V3 U4.V4 U4.V5 U4.V6 U4.V7 U4.V8 U4.V9 U4.V10 U4.V11 U4.V12 U4.V13 U4.V14 U4.V15 U4.V16 U4.V21 U4.V22 U4.W1 U4.W2 U4.W6 U4.W7 U4.W8 U4.W10 U4.W13 U4.W14 U4.W15 U4.W17 U4.W19 U4.W20 U4.W21 U4.W22 U4.Y1 U4.Y2 U4.Y3 U4.Y4 U4.Y6 U4.Y7 U4.Y8 U4.Y10 U4.Y13 U4.Y17 U4.Y21 U4.Y22 U7.6 U7.7 U7.8 U8.2 U8.9 U8.10 U8.27 U8.28 U8.29 U8.30 U8.31 U8.42 U8.44 U8.53 U8.64 Uclk1.7 Uclk1.9 Uclk1.10 UFL1.4 UFL1.7 UFL1.8 UFL1.45 UFL1.46 UFL1.47 UFL1.48 UFL1.49 UFL1.54 UFL1.55 UFL1.56 UFL1.57 UFL1.63 UFL1.64 UFL1.65 UFL1.66 UFL1.67 UFL1.70 UFL1.71 UFL1.72 UFL1.73 UFL2.4 UG1.1 UG2.4 UG2.9 UG2.10 UG2.11 UG2.12 UG2.14 UG2.15 UG2.16 UG3.3 UG3.7 UL1.1 UL1.6 UL1.8 UL1.9 UL1.12 UL1.13 UL1.14 UL2.1 UL2.6 UL2.8 UL2.9 UL2.12 UL2.13 UL2.14 Uref8.4
copper on no net: | length 190.2
  Top Layer w0.2: 130,127.5 130.5,127 ; 130,128.5 130.5,128 ; 130,130.5 130.5,130 ; 130,131.5 130.5,131 ; 130,132.5 130.5,132 ; 130,133.5 130.5,133 ; 131,114.5 131.5,115 ; 131,115.5 131.5,116 ; 131,116.5 131.5,117 ; 131,117.5 131.5,118 ; 131,118.5 131.5,119 ; 131,120.5 131.5,121 ; 131,121.5 131.5,122 ; 131,122.5 131.5,123 ; 131,123.5 131.5,124 ; 131,125.5 131.5,125 ; 131,126.5 131.5,126 ; v1(131,127.5) 131.5,127 ; v1(131,128.5) 131.5,128 ; v1(131,130.5) 131.5,130 ; v1(131,131.5) 131.5,131 ; v1(131,132.5) 131.5,132 ; v1(131,133.5) 131.5,133 ; 131,134.5 131.5,134 ; 132,114.5 132.5,115 ; v1@132,115.5 132.5,116 ; v1(132,116.5) 132.5,117 ; v1(132,118.5) 132.5,119 ; v1(132,120.5) 132.5,121 ; v1(132,125.5) 132.5,125 ; v1(132,126.5) 132.5,126 ; v1(132,127.5) 132.5,127 ; v1(132,128.5) 132.5,128 ; v1(132,130.5) 132.5,130 ; v1(132,132.5) 132.5,132 ; v1(132,134.5) 132.5,134 ; 132,135.5 132.5,135 ; 133,114.5 133.5,115 ; v1(133,115.5) 133.5,116 ; v1(133,116.5) 133.5,117 ; v1(133,118.5) 133.5,119 ; v1(133,120.5) 133.5,121 ; v1(133,122.5) 133.5,123 ; v1(133,125.5) 133.5,125 ; v1(133,126.5) 133.5,126 ; v1(133,128.5) 133.5,128 ; v1(133,130.5) 133.5,130 ; v1(133,132.5) 133.5,132 ; 133,134.5 133.5,134 ; 134,114.5 134.5,115 ; v1(134,119.5) 134.5,120 ; v1(134,120.5) 134.5,121 ; v1(134,121.5) 134.5,122 ; v1(134,122.5) 134.5,123 ; v1(134,126.5) 134.5,126 ; v1(134,128.5) 134.5,128 ; v1(134,129.5) 134.5,129 ; 134,134.5 134.5,134 ; 135,114.5 135.5,115 ; v1(135,115.5) 135.5,116 ; v1(135,116.5) 135.5,117 ; v1(135,118.5) 135.5,119 ; v1(135,119.5) 135.5,120 ; v1(135,120.5) 135.5,121 ; v1(135,121.5) 135.5,122 ; v1(135,122.5) 135.5,123 ; v1(135,126.5) 135.5,126 ; v1(135,127.5) 135.5,127 ; v1(135,128.5) 135.5,128 ; v1(135,129.5) 135.5,129 ; v1(135,130.5) 135.5,130 ; v1(135,132.5) 135.5,132 ; v1(135,133.5) 135.5,133 ; v1(135,134.5) 135.5,134 ; 135,135.5 135.5,135 ; 136,114.5 136.5,115 ; v1(136,117.5) 136.5,118 ; v1(136,118.5) 136.5,119 ; v1(136,119.5) 136.5,120 ; v1(136,120.5) 136.5,121 ; v1(136,125.5) 136.5,125 ; v1(136,126.5) 136.5,126 ; v1(136,127.5) 136.5,127 ; v1(136,128.5) 136.5,128 ; v1(136,129.5) 136.5,129 ; v1(136,130.5) 136.5,130 ; v1(136,131.5) 136.5,131 ; v1(136,134.5) 136.5,134 ; 136,135.5 136.5,135 ; 137,114.5 137.5,115 ; v1(137,115.5) 137.5,116 ; v1(137,116.5) 137.5,117 ; v1(137,117.5) 137.5,118 ; v1(137,118.5) 137.5,119 ; v1(137,119.5) 137.5,120 ; v1(137,120.5) 137.5,121 ; v1(137,127.5) 137.5,127 ; v1(137,128.5) 137.5,128 ; v1(137,129.5) 137.5,129 ; v1(137,130.5) 137.5,130 ; v1(137,131.5) 137.5,131 ; v1(137,132.5) 137.5,132 ; v1(137,134.5) 137.5,134 ; 137,135.5 137.5,135 ; 138,114.5 138.5,115 ; v1(138,117.5) 138.5,118 ; v1(138,118.5) 138.5,119 ; v1(138,119.5) 138.5,120 ; v1(138,120.5) 138.5,121 ; v1(138,128.5) 138.5,128 ; v1(138,129.5) 138.5,129 ; v1(138,130.5) 138.5,130 ; v1(138,131.5) 138.5,131 ; v1(138,132.5) 138.5,132 ; v1(138,134.5) 138.5,134 ; 138,135.5 138.5,135 ; 139,114.5 139.5,115 ; v1(139,115.5) 139.5,116 ; v1(139,116.5) 139.5,117 ; v1(139,117.5) 139.5,118 ; v1(139,118.5) 139.5,119 ; v1(139,119.5) 139.5,120 ; v1(139,129.5) 139.5,129 ; v1(139,130.5) 139.5,130 ; v1(139,131.5) 139.5,131 ; v1(139,132.5) 139.5,132 ; v1(139,133.5) 139.5,133 ; v1(139,134.5) 139.5,134 ; 139,135.5 139.5,135 ; v1(140,117.5) 140.5,118 ; v1(140,129.5) 140.5,129 ; v1(140,130.5) 140.5,130 ; v1(140,131.5) 140.5,131 ; 141.5,118 v1(142,117.5) ; 141.5,119 v1(142,118.5) ; 141.5,120 v1@142,119.5 ; 141.5,121 v1(142,120.5) ; 141.5,129 v1@142,129.5 ; 141.5,130 v1(142,130.5) ; 141.5,131 v1@142,131.5 ; 142.5,114 143,113.5 ; 142.5,115 v1(143,114.5) ; 142.5,116 v1(143,115.5) ; 142.5,117 v1(143,116.5) ; 142.5,118 v1(143,117.5) ; 142.5,119 v1(143,118.5) ; 142.5,120 v1(143,119.5) ; 142.5,121 v1(143,120.5) ; 142.5,129 v1(143,129.5) ; 142.5,130 v1(143,130.5) ; 142.5,131 v1(143,131.5) ; 142.5,132 v1(143,132.5) ; 142.5,133 v1(143,133.5) ; 142.5,134 v1(143,134.5) ; 142.5,135 143,135.5 ; 143.5,114 144,113.5 ; 143.5,115 v1(144,114.5) ; 143.5,118 v1(144,117.5) ; 143.5,119 v1(144,118.5) ; 143.5,120 v1(144,119.5) ; 143.5,129 v1(144,129.5) ; 143.5,130 v1(144,130.5) ; 143.5,131 v1(144,131.5) ; 143.5,134 144,134.5 ; 144.5,125 v1(145,125.5) ; 144.5,129 v1(145,129.5) ; 144.5,131 v1(145,131.5) ; 144.5,115 145,114.5 ; 144.5,116 v1(145,115.5) ; 144.5,119 v1(145,118.5) ; 144.5,120 v1(145,119.5) ; 144.5,121 v1(145,120.5) ; 144.5,122 v1(145,121.5) ; 144.5,123 v1(145,122.5) ; 144.5,124 v1(145,123.5) ; 144.5,126 v1(145,126.5) ; 144.5,130 v1(145,130.5) ; 144.5,132 v1(145,132.5) ; 144.5,133 v1(145,133.5) ; 144.5,134 145,134.5 ; 145.5,114 146,113.5 ; 145.5,115 v1(146,114.5) ; 145.5,116 v1(146,115.5) ; 145.5,117 v1(146,116.5) ; 145.5,118 v1(146,117.5) ; 145.5,119 v1(146,118.5) ; 145.5,120 v1(146,119.5) ; 145.5,121 v1(146,120.5) ; 145.5,122 v1(146,121.5) ; 145.5,123 v1(146,122.5) ; 145.5,124 v1(146,123.5) ; 145.5,125 v1(146,125.5) ; 145.5,126 v1(146,126.5) ; 145.5,127 v1(146,127.5) ; 145.5,128 v1(146,128.5) ; 145.5,129 v1(146,129.5) ; 145.5,130 v1(146,130.5) ; 145.5,131 v1(146,131.5) ; 145.5,132 v1(146,132.5) ; 145.5,133 v1(146,133.5) ; 145.5,134 146,134.5 ; 146.5,114 147,113.5 ; 146.5,115 v1(147,114.5) ; 146.5,116 v1(147,115.5) ; 146.5,117 v1(147,116.5) ; 146.5,118 v1(147,117.5) ; 146.5,121 v1(147,120.5) ; 146.5,122 v1(147,121.5) ; 146.5,124 v1(147,123.5) ; 146.5,125 v1(147,125.5) ; 146.5,126 v1(147,126.5) ; 146.5,127 v1(147,127.5) ; 146.5,128 v1(147,128.5) ; 146.5,131 v1(147,131.5) ; 146.5,132 v1(147,132.5) ; 146.5,133 v1(147,133.5) ; 147.5,115 148,114.5 ; 147.5,118 v1(148,117.5) ; 147.5,120 v1(148,119.5) ; 147.5,121 v1(148,120.5) ; 147.5,122 v1(148,121.5) ; 147.5,125 v1(148,125.5) ; 147.5,126 v1(148,126.5) ; 147.5,127 v1(148,127.5) ; 147.5,128 v1(148,128.5) ; 147.5,129 v1(148,129.5) ; 147.5,131 v1(148,131.5) ; 147.5,134 v1(148,134.5) ; 148.5,115 149,114.5 ; 148.5,116 v1(149,115.5) ; 148.5,118 v1(149,117.5) ; 148.5,120 v1(149,119.5) ; 148.5,122 v1(149,121.5) ; 148.5,124 v1(149,123.5) ; 148.5,125 v1(149,125.5) ; 148.5,127 v1(149,127.5) ; 148.5,129 v1(149,129.5) ; 148.5,131 v1(149,131.5) ; 148.5,133 v1(149,133.5) ; 148.5,134 v1(149,134.5) ; 148.5,135 149,135.5 ; 149.5,125 v1(150,125.5) ; 149.5,127 v1(150,127.5) ; 149.5,129 v1(150,129.5) ; 149.5,131 v1(150,131.5) ; 149.5,134 v1(150,134.5) ; 149.5,115 150,114.5 ; 149.5,116 v1(150,115.5) ; 149.5,118 v1(150,117.5) ; 149.5,120 v1(150,119.5) ; 149.5,122 v1(150,121.5) ; 149.5,133 v1(150,133.5) ; 149.5,135 150,135.5 ; 150.5,115 151,114.5 ; 150.5,116 151,115.5 ; 150.5,117 151,116.5 ; 150.5,119 151,118.5 ; 150.5,121 151,120.5 ; 150.5,122 151,121.5 ; 150.5,125 151,125.5 ; 150.5,126 151,126.5 ; 150.5,127 151,127.5 ; 150.5,128 151,128.5 ; 150.5,130 151,130.5 ; 150.5,131 151,131.5 ; 150.5,132 151,132.5 ; 150.5,133 151,133.5 ; 151.5,128 152,128.5 ; 151.5,134 v1(152,134.5)
  other v1: 132,115.5 142,119.5 142,129.5 142,131.5
  other v3: 113.6,159.4 115.4,159.4 117.2,159.4 118.9,159.4 113.6,161.2 115.4,161.2 117.2,161.2 118.9,161.2 113.6,163 115.4,163 117.2,163 118.9,163 113.6,164.7 115.4,164.7 117.2,164.7 118.9,164.7
  other v7: 161.793,139.533
  other v8: 64,56 90,56 167,56 64,191 90,191 167,191

## Polygon pours and split planes (outlines as drawn)
"+1.2 VDIG" on MidLayer1 "1.2V" (hatched 90Degree grid 0.15 track 0.175, remove dead copper, pour order 2): 135.5,130 135.5,119 146.5,119 146.5,130
"+2.5 VDIG" on MidLayer1 "+2.5V" (hatched 90Degree grid 0.15 track 0.175, remove dead copper, pour order 4): 129.5,136 152.5,136 152.5,113 129.5,113
no net on Internal Plane 1 (split plane): 179.49,50.51 50.51,50.51 50.51,199.49 179.49,199.49
no net on Internal Plane 2 (split plane): 179.49,50.51 50.51,50.51 50.51,199.49 179.49,199.49

## Silkscreen, mask and mechanical layers (free items; w line width, h text height)
Top Solder:
  lines w0.254: 52,52 174,52 174,195 52,195 52,52
Bottom Solder:
  lines w0.254: 52,52 174,52 174,195 52,195 52,52